# Altium PCB mcb.PcbDoc (part 1 of 2)
Units mil, origin at the board's own origin, x right, y up, seen from the top; angles counter-clockwise.
Board outline 4133.86 x 3543.31 mil, 2 copper layers (Top Layer, Bottom Layer); 79 components, 88 nets, 392 pads, 91 vias.
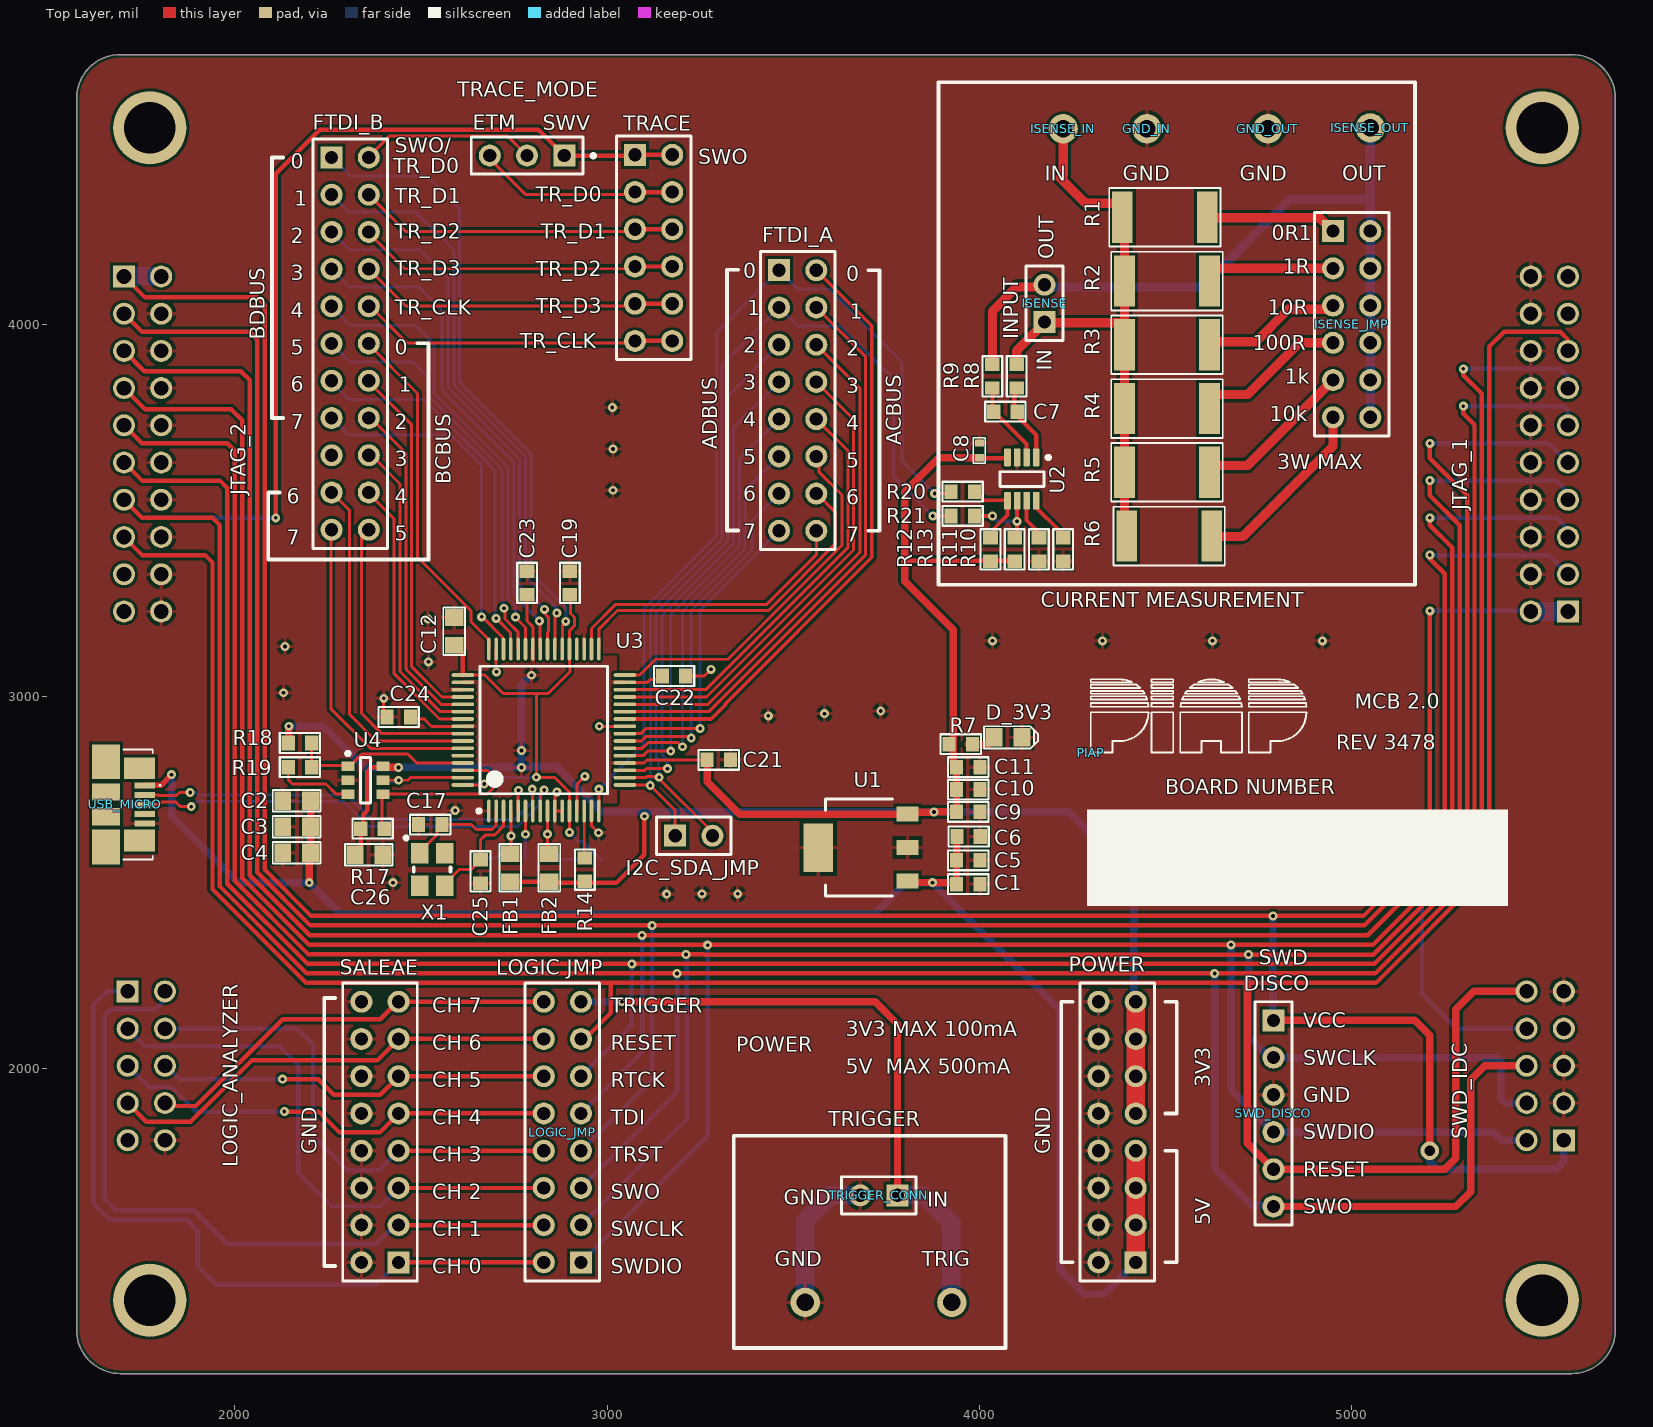
[diagram p0: Top Layer view]
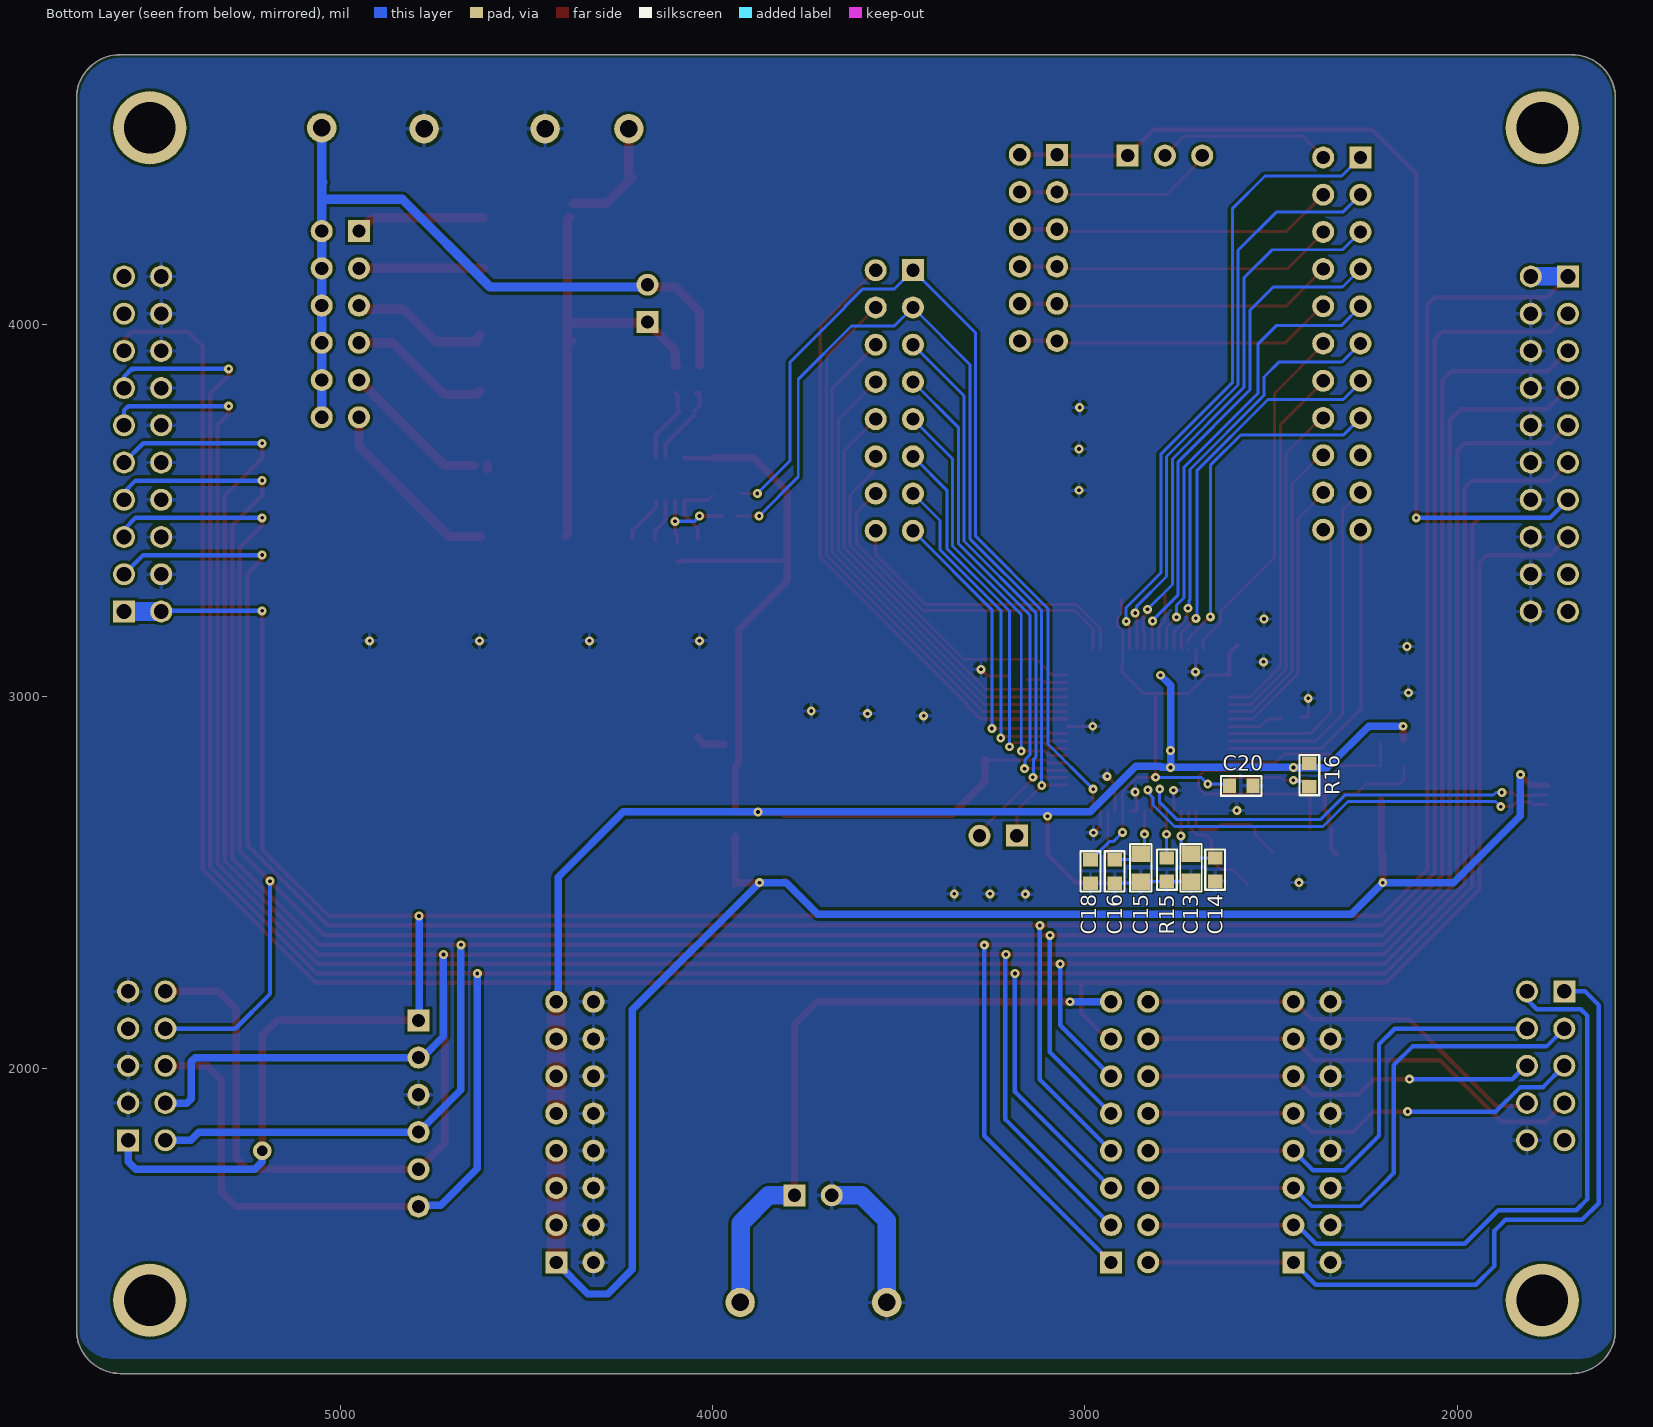
[diagram p1: Bottom Layer view, seen from below]
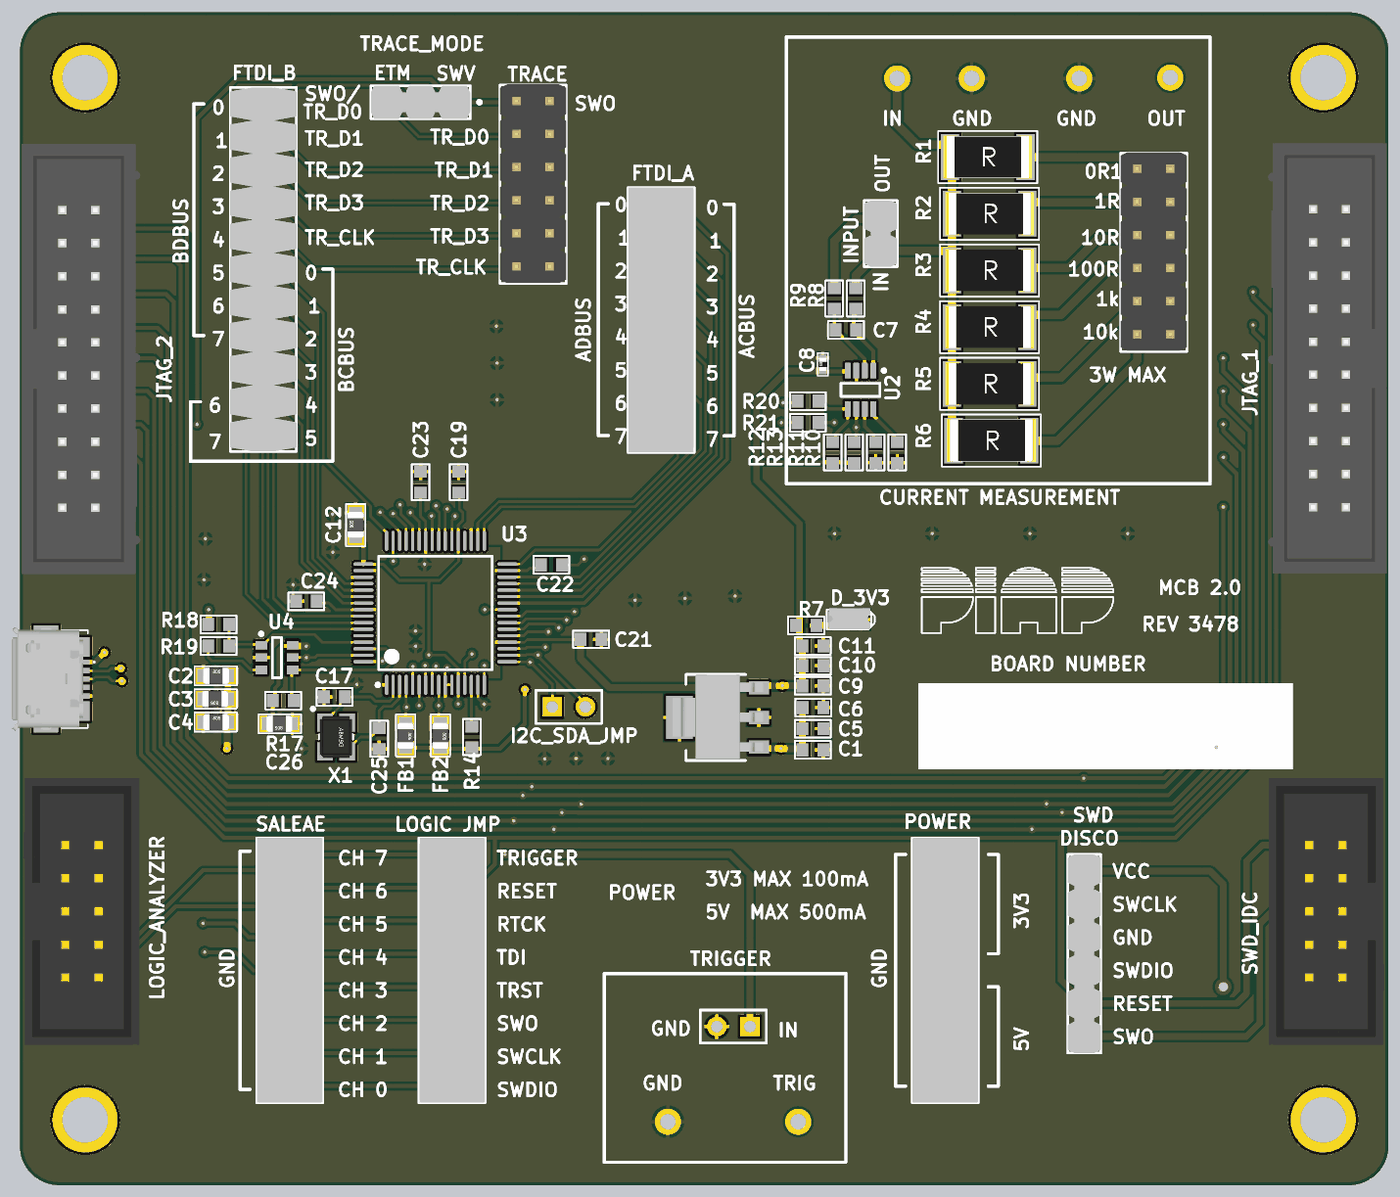
[diagram p2: 3D render of the assembled board from above, using the file's embedded part models]

## Layer stack, top to bottom
Top Solder: solder mask 0.4, Solder Resist, Dk 3.5
Top Layer: signal copper 1.4
Dielectric 1: dielectric 12.6, FR-4, Dk 4.8
Bottom Layer: signal copper 1.4
Bottom Solder: solder mask 0.4, Solder Resist, Dk 3.5

## Board outline
1574.8,4606.3 cw(c1692.91,4606.3) 1692.91,4724.41 5590.55,4724.41 cw(c5590.55,4606.3) 5708.66,4606.3 5708.66,1299.21 cw(c5590.56,1299.21) 5590.55,1181.1 1692.91,1181.1 cw(c1692.8,1299.09) 1574.8,1299.21

## Design rules (kind name [scope] priority, off if disabled: settings)
Clearance [All] p1: gap=7.5 ignorepadtopadclearanceinfootprint=FALSE
DiffPairsRouting "Schematic Differential Pairs Routing_1" [InNet('USB_N')] p1: maxlimit=10 minlimit=10 mostfreqgap=10 toplayer_minwidth=15 toplayer_maxwidth=15 toplayer_prefwidth=15 bottomlayer_minwidth=15 bottomlayer_maxwidth=15 bottomlayer_prefwidth=15 maxuncoupledlength=500
DiffPairsRouting "Schematic Differential Pairs Routing" [InNet('USB_P')] p2: maxlimit=10 minlimit=10 mostfreqgap=10 toplayer_minwidth=15 toplayer_maxwidth=15 toplayer_prefwidth=15 bottomlayer_minwidth=15 bottomlayer_maxwidth=15 bottomlayer_prefwidth=15 maxuncoupledlength=500
DiffPairsRouting [All] p3: maxlimit=10 minlimit=10 mostfreqgap=10 toplayer_minwidth=15 toplayer_maxwidth=15 toplayer_prefwidth=15 bottomlayer_minwidth=15 bottomlayer_maxwidth=15 bottomlayer_prefwidth=15 maxuncoupledlength=500
HoleSize [All] p1: absolutevalues=TRUE maxlimit=200 minlimit=10 maxpercent=80.000 minpercent=20.000
MatchedLengths [InNetClass('i2c')] p1: tolerance=100 checknetsindiffpair=FALSE checkdiffpairvsdiffpair=TRUE checkxsignals=TRUE checkothers=TRUE
MinimumAnnularRing [All] p1: minimumring=7
MinimumSolderMaskSliver [All] p1: minsoldermaskwidth=0
PolygonConnect [All] p1: connectstyle=Relief reliefconductorwidth=10 reliefentries=4 polygonreliefangle="90 Angle" airgapwidth=10
RoutingVias [All] p1: holewidth=12 width=22 viastyle="Through Hole" minholewidth=12 minwidth=22 maxholewidth=28 maxwidth=22
SilkToSilkClearance [All] p1: silktosilkclearance=0
SilkToSolderMaskClearance [IsPad] p1: minsilkscreentomaskgap=0 clearancetoexposedcopper=TRUE
SolderMaskExpansion [All] p1: expansion=8
Width Width_Power [InNetClass('Power')] p1: maxlimit=50 minlimit=15 preferedwidth=20
Width Width_measurements [InNetClass('Measurements')] p2: maxlimit=100 minlimit=20 preferedwidth=25 minimp=50.000000 maximp=50.000000 favimp=50.000000
25 further rules are at their usual default settings.

## Classes and differential pairs
component class usb_converter: C1 C5 C6 C9 C10 C11 C12 C13 C14 C15 C16 C17 C18 C19 C20 C21 C22 C23 C24 C25 C26 D_3V3 FB1 FB2 I2C_SDA_JMP R7 R14 R15 R16 R17 R18 R19 U1 U3 U4 X1
differential pair class DIFF90: USB
component class main: C2 C3 C4 C7 C8 FTDI_A FTDI_B GND GND_IN GND_OUT ISENSE ISENSE_IN ISENSE_JMP ISENSE_OUT JTAG_1 JTAG_2 LOGIC_ANALYZER LOGIC_JMP PIAP POWER R1 R2 R3 R4 R5 R6 R8 R9 R10 R11 R12 R13 R20 R21 SALEAE SWD_DISCO SWD_IDC TRACE TRACE_MODE TRIG TRIGGER_CONN U2 USB_MICRO
differential pair USB: +USB_P -USB_N

## Components (designator, comment, footprint, x,y, rotation, side; value= is the part's Value field where it differs from the comment)
C1 "10uF/16V" 0603 3970,2496 r180 top
C2 "10nF/16V X7R" 0805 2166,2720 r0 top
C3 "100nF/16V X7R" 0805 2166,2650 r180 top
C4 "4.7u/16V X7R" 0805 2166,2580 r0 top
C5 "10uF/16V" 0603 3970,2560 r180 top
C6 "100nF/16V" 0603 3971,2624 r180 top
C7 "NS" 0603 4070,3765 r0 top
C8 "100nF/16V" 0402 4000,3661 r90 top
C9 "100nF/16V" 0603 3970,2690 r180 top
C10 "10uF/16V" 0603 3970,2750 r180 top
C11 "10uF/16V" 0603 3970,2810 r180 top
C12 "3.3u/16V X7R" 0805 2589,3175 r90 top
C13 "4.7u/16V X7R" 0805 2715,2540 r270 bottom
C14 "100nF/16V" 0603 2650,2535 r270 bottom
C15 "4.7u/16V X7R" 0805 2850,2540 r270 bottom
C16 "100nF/16V" 0603 2920,2530 r270 bottom
C17 "27p" 0603 2525,2656 r180 top
C18 "100nF/16V" 0603 2985,2530 r270 bottom
C19 "100nF/16V" 0603 2900,3305 r90 top
C20 "100nF/16V" 0603 2580,2760 r180 bottom
C21 "100nF/16V" 0603 3300,2830 r0 top
C22 "100nF/16V" 0603 3180,3055 r0 top
C23 "100nF/16V" 0603 2785,3305 r90 top
C24 "100nF/16V" 0603 2440,2945 r180 top
C25 "27p" 0603 2660,2530 r270 top
C26 "100nF/16V X7R" 0805 2360,2575 r180 top
D_3V3 "LED Green" "LED SMD 0805" 4077,2890 r0 top
FB1 "MMZ2012R102A" 0805 2740,2540 r270 top
FB2 "MMZ2012R102A" 0805 2845,2540 r270 top
FTDI_A "Header 8X2" HDR2X8 3512,3795 r270 top
FTDI_B "Header 11X2" HDR2X11 2310,3948 r270 top
GND "TEST_POINT_THT" TEST_POINT_THT 3532.2,1372.44 r270 top
GND_IN "TEST_POINT_THT" TEST_POINT_THT 4450,4525 r90 top
GND_OUT "TEST_POINT_THT" TEST_POINT_THT 4775,4525 r90 top
I2C_SDA_JMP "Header 2" HDR1X2 3233,2626 r0 top
ISENSE "Header 2" HDR1X2 4175,4056 r90 top
ISENSE_IN "TEST_POINT_THT" TEST_POINT_THT 4225,4525 r90 top
ISENSE_JMP "" HDR2X6 5000,4000 r270 top
ISENSE_OUT "TEST_POINT_THT" TEST_POINT_THT 5050,4527.56 r90 top
JTAG_1 "DS1013-20SSIB1-B-0" HDR2X10 5531.18,3678.35 r90 top value="Header 10X2"
JTAG_2 "DS1013-20SSIB1-B-0" HDR2X10 1752.28,3678.35 r270 top value="Header 10X2"
LOGIC_ANALYZER "DS1013-10SSIB1" "HDR2X5 socet" 1762.28,2007.87 r270 top value="Header 5X2"
LOGIC_JMP "Header 8X2" HDR2X8 2880,1830 r90 top
PIAP "LOGO" PIAP_5mm 4299.16,2849.44 r0 top
POWER "Header 8X2" HDR2X8 4370,1830 r90 top
R1 "0.1R" 2512 4498.57,4287.3 r0 top
R2 "1R" 2512 4504,4116.04 r0 top
R3 "10R" 2512 4504,3944.78 r0 top
R4 "100R" 2512 4504,3773.52 r0 top
R5 "1k" 2512 4504,3602.26 r0 top value=1K
R6 "10K" 2512 4509.43,3431 r0 top
R7 "330R" 0603 3950,2872 r0 top
R8 "0R" 0603 4100,3860 r90 top
R9 "0R" 0603 4035,3860 r90 top
R10 "10k" 0603 4225,3395 r270 top
R11 "10k" 0603 4160,3395 r270 top
R12 "10k" 0603 4030,3395 r270 top
R13 "10k" 0603 4095,3395 r270 top
R14 "100k" 0603 2940,2535 r270 top
R15 "12k" 0603 2780,2535 r270 bottom
R16 "10k" 0603 2397,2789 r270 bottom
R17 "10k" 0603 2370,2645 r0 top
R18 "10k" 0603 2175,2875 r0 top
R19 "2k" 0603 2175,2810 r180 top
R20 "0R" 0603 3955,3550 r0 top
R21 "0R" 0603 3955,3485 r0 top
SALEAE "Header 8X2" HDR2X8 2390,1830 r90 top
SWD_DISCO "Header 6" HDR1X6 4790,1880 r270 top
SWD_IDC "DS1013-10SSIB1" "HDR2X5 socet" 5520,2007.87 r90 top value="Header 5X2"
TRACE "HDR-6X2" HDR2X6 3125,4205 r270 top
TRACE_MODE "Header 3" HDR1X3 2785,4453 r180 top
TRIG "TEST_POINT_THT" TEST_POINT_THT 3925.91,1372.44 r270 top
TRIGGER_CONN "Header 2" HDR1X2 3730,1660 r180 top
U1 "TC1262-3.3VDB" SOT223 3687,2594 r90 top
U2 "INA219BIDCNT" DCN0008A_M 4114,3584 r270 top
U3 "FT2232HL-Reel" LQFP-64_L 2830,2910 r90 top
U4 "93LC56BT-I/OT" SOT-23-OT6_L 2351,2775 r0 top
USB_MICRO "47346-0001" 47346-0001 1744.09,2807.09 r270 top locked
X1 "12 MHz" ABM8G 2530,2535 r270 top

## Footprints (in the part's own frame and the unit in brackets; to place one, negate y for a bottom-side part, rotate by r counter-clockwise, add the part's x,y. Pads: shape width x height; smd on the part's side, far side on the other; paste and mask are expansions set on the pad)
0402 [mm] "0402 SMD footprint"
  rect 0.5x0.6 smd: 1(-0.5,0) 2(0.5,0)
  silkscreen extent -0.87,-0.41 0.87,0.41, body extent -0.5,-0.3 0.5,0.3, height 0.2
0603 [mm] "Generic 0603 footprint"
  rect 0.9x1 smd: 1(-0.8,0) 2(0.8,0)
  silkscreen extent -1.38,-0.67 1.38,0.67, body extent -0.87,-0.48 0.88,0.47, height 1
0805 [mil]
  rect 45x50 smd paste-5: 1(-37.5,0) 2(37.5,0)
  silkscreen extent -64,-29 64,29, body extent -38,-25 41,25, height 31
2512 [mm] "3.7mm x 7.75mm"
  rect 1.4x3.5 smd: 1(-2.9,0) 2(2.9,0)
  silkscreen extent -3.8,-2 3.8,2, body extent -3.4,-1.65 3.4,1.65, height 0.64
47346-0001 [mm] "Molex USB micro B receptable"
  rect 0.406x1.38 smd: 1(1.163,0.36) 2(1.813,0.36) 3(2.462,0.36) 4(3.112,0.36) 5(3.763,0.36)
  rect 1.475x2.1 smd: SH1(0,0) SH2(4.925,0)
  rect 2.375x1.9 smd: SH3(-0.45,-2.3) SH6(5.375,-2.3)
  rect 1.175x1.9 smd: SH4(1.625,-2.3) SH5(3.3,-2.3)
  silkscreen extent -1.29,-1.1 6.21,1.45, body extent -1.54,-4.88 6.44,0.55, height 2.69
ABM8G [mm] "Small SMD Crystal"
  rect 1.4x1.2 smd: 1(-1.1,-0.85) 2(1.1,-0.85) 3(1.1,0.85) 4(-1.1,0.85)
  silkscreen extent -2.27,-1.89 0.15,1.25, body extent -1.6,-1.25 1.6,1.25, height 1.01
DCN0008A_M [mm] "SOT23, 8-Leads, Body 3x1.75mm, Pitch 0.65mm, IPC Low Density"
  rrect22% 1.2x0.45 smd: 1(-1.475,0.975) 2(-1.475,0.325) 3(-1.475,-0.325) 4(-1.475,-0.975) 5(1.475,-0.975) 6(1.475,-0.325) 7(1.475,0.325) 8(1.475,0.975)
  silkscreen extent -1.6,-1.5 0.5,1.92, body extent -0.88,-1.5 0.87,1.5, height 1.45
HDR1X2 [mm] "Connector; Header; 2 Position"
  rect 1.5x1.5 hole 0.9: 1(-1.27,0)
  round 1.5 hole 0.9: 2(1.27,0)
  silkscreen extent -2.54,-1.27 2.54,1.27
HDR1X3 [mm] "Connector; Header; 3 Position"
  rect 1.5x1.5 hole 0.9: 1(-2.54,0)
  round 1.5 hole 0.9: 2(0,0) 3(2.54,0)
  silkscreen extent -4.52,-1.27 3.81,1.27, body extent -3.81,-1.27 3.81,1.27, height 9.3
HDR1X6 [mm] "Connector; Header; 6 Position"
  rect 1.5x1.5 hole 0.9: 1(-6.35,0)
  round 1.5 hole 0.9: 2(-3.81,0) 3(-1.27,0) 4(1.27,0) 5(3.81,0) 6(6.35,0)
  silkscreen extent -7.62,-1.27 7.62,1.27, body extent -7.62,-1.27 7.62,1.27, height 9.32
"HDR2X5 socet" [mm] "Connector; Header; 5x2 Position"
  rect 1.5x1.5 hole 1: 1(-5.08,-1.27)
  round 1.5 hole 1: 2(-5.08,1.27) 3(-2.54,-1.27) 4(-2.54,1.27) 5(0,-1.27) 6(0,1.27) 7(2.54,-1.27) 8(2.54,1.27) 9(5.08,-1.27) 10(5.08,1.27)
  body extent -10.25,-4.5 10.25,4.4, height 9
HDR2X6 [mm] "Connector; Header; 6x2 Position"
  rect 1.5x1.5 hole 0.9: 1(-6.35,-1.27)
  round 1.5 hole 0.9: 2(-6.35,1.27) 3(-3.81,-1.27) 4(-3.81,1.27) 5(-1.27,-1.27) 6(-1.27,1.27) 7(1.27,-1.27) 8(1.27,1.27) 9(3.81,-1.27) 10(3.81,1.27) 11(6.35,-1.27) 12(6.35,1.27)
  silkscreen extent -7.62,-2.54 7.62,2.54, body extent -7.67,-2.54 7.57,2.54, height 8.59
HDR2X8 [mm] "Connector; Header; 8x2 Position"
  rect 1.5x1.5 hole 0.9: 1(-8.89,-1.27)
  round 1.5 hole 0.9: 2(-8.89,1.27) 3(-6.35,-1.27) 4(-6.35,1.27) 5(-3.81,-1.27) 6(-3.81,1.27) 7(-1.27,-1.27) 8(-1.27,1.27) 9(1.27,-1.27) 10(1.27,1.27) 11(3.81,-1.27) 12(3.81,1.27) 13(6.35,-1.27) 14(6.35,1.27) 15(8.89,-1.27) 16(8.89,1.27)
  silkscreen extent -10.16,-2.54 10.16,2.54, body extent -10.16,-2.5 10.16,2.5, height 9.5
HDR2X10 [mm] "Connector; Header; 10x2 Position"
  rect 1.5x1.5 hole 1: 1(-11.43,-1.27)
  round 1.5 hole 1: 2(-11.43,1.27) 3(-8.89,-1.27) 4(-8.89,1.27) 5(-6.35,-1.27) 6(-6.35,1.27) 7(-3.81,-1.27) 8(-3.81,1.27) 9(-1.27,-1.27) 10(-1.27,1.27) 11(1.27,-1.27) 12(1.27,1.27) 13(3.81,-1.27) 14(3.81,1.27) 15(6.35,-1.27) 16(6.35,1.27) 17(8.89,-1.27) 18(8.89,1.27) 19(11.43,-1.27) 20(11.43,1.27)
  body extent -16.48,-4.37 16.54,4.73, height 8.75
HDR2X11 [mm] "Connector; 2.54mm; Header; 11x2 Position"
  rect 1.5x1.5 hole 0.9: 1(-12.7,-1.27)
  round 1.5 hole 0.9: 2(-12.7,1.27) 3(-10.16,-1.27) 4(-10.16,1.27) 5(-7.62,-1.27) 6(-7.62,1.27) 7(-5.08,-1.27) 8(-5.08,1.27) 9(-2.54,-1.27) 10(-2.54,1.27) 11(0,-1.27) 12(0,1.27) 13(2.54,-1.27) 14(2.54,1.27) 15(5.08,-1.27) 16(5.08,1.27) 17(7.62,-1.27) 18(7.62,1.27) 19(10.16,-1.27) 20(10.16,1.27) 21(12.7,-1.27) 22(12.7,1.27)
  silkscreen extent -13.97,-2.54 13.97,2.54, body extent -13.97,-2.54 13.97,2.54, height 9.3
"LED SMD 0805" [mil]
  rect 45x50 smd: 1(-37.5,0) 2(37.5,0)
  silkscreen extent -65,-30 80,30, body extent -57,-29 67,34, height 39
LQFP-64_L [mm] "Thin QFP, 64-Leads, Body 10x10mm, Pitch 0.5mm, IPC High Density"
  oval 1.55x0.25 smd: 1(-5.525,3.75) 2(-5.525,3.25) 3(-5.525,2.75) 4(-5.525,2.25) 5(-5.525,1.75) 6(-5.525,1.25) 7(-5.525,0.75) 8(-5.525,0.25) 9(-5.525,-0.25) 10(-5.525,-0.75) 11(-5.525,-1.25) 12(-5.525,-1.75) 13(-5.525,-2.25) 14(-5.525,-2.75) 15(-5.525,-3.25) 16(-5.525,-3.75) 33(5.525,-3.75) 34(5.525,-3.25) 35(5.525,-2.75) 36(5.525,-2.25) 37(5.525,-1.75) 38(5.525,-1.25) 39(5.525,-0.75) 40(5.525,-0.25) 41(5.525,0.25) 42(5.525,0.75) 43(5.525,1.25) 44(5.525,1.75) 45(5.525,2.25) 46(5.525,2.75) 47(5.525,3.25) 48(5.525,3.75)
  oval 0.25x1.55 smd: 17(-3.75,-5.525) 18(-3.25,-5.525) 19(-2.75,-5.525) 20(-2.25,-5.525) 21(-1.75,-5.525) 22(-1.25,-5.525) 23(-0.75,-5.525) 24(-0.25,-5.525) 25(0.25,-5.525) 26(0.75,-5.525) 27(1.25,-5.525) 28(1.75,-5.525) 29(2.25,-5.525) 30(2.75,-5.525) 31(3.25,-5.525) 32(3.75,-5.525) 49(3.75,5.525) 50(3.25,5.525) 51(2.75,5.525) 52(2.25,5.525) 53(1.75,5.525) 54(1.25,5.525) 55(0.75,5.525) 56(0.25,5.525) 57(-0.25,5.525) 58(-0.75,5.525) 59(-1.25,5.525) 60(-1.75,5.525) 61(-2.25,5.525) 62(-2.75,5.525) 63(-3.25,5.525) 64(-3.75,5.525)
  silkscreen extent -5.65,-4.35 4.35,4.55, body extent -5,-5 5,5, height 1.6
PIAP_5mm [mil]
  silkscreen extent 0,0 579,197
SOT223 [mil]
  rect 40x60 smd: 1(-90,-120) 2(0,-120) 3(90,-120)
  rect 130x80 smd: 2(0,120)
  silkscreen extent -130,-80 130,100, body extent -127,-132 129,140, height 66
SOT-23-OT6_L [mm] "SOT23, 6-Leads, Body 2.9x1.7mm, Pitch 0.95mm, Lead Span 2.8mm, IPC High Density"
  rect 0.9x0.65 smd: 1(-1.2,0.95) 2(-1.2,0) 3(-1.2,-0.95) 4(1.2,-0.95) 5(1.2,0) 6(1.2,0.95)
  silkscreen extent -1.32,-1.55 0.35,1.95, body extent -0.9,-1.55 0.9,1.55, height 1.45
TEST_POINT_THT [mm]
  round 2 hole 1.2 paste+0 mask+0: 1(0,0)

## Part data
C1 C5 C10 C11: "10uF,16V,0603,X5R, 10%", DIelectric=X5R, Tolerance=10%, Supplier 1=Farnell
C2: library part n100, "Chip Capacitor 10nF/16V X7R", Dostawca=Farnell, email=AGrabowska@farnell.com, Opis="Chip Capacitor", Tel/Fax="+48 12 4424724"
C3 C26: library part n100, "Chip Capacitor 100nF/16V X7R", Dostawca=Farnell, email=AGrabowska@farnell.com, Opis="Chip Capacitor", Tel/Fax="+48 12 4424724"
C4 C13 C15: library part n100, "Chip Capacitor 4.7u/16V X7R", Dostawca=Farnell, email=AGrabowska@farnell.com, Opis="Chip Capacitor", Tel/Fax="+48 12 4424724"
C6 C9: "100nF,16V,0603,,X7R", DIelectric=X7R, Tolerance=10%, Supplier 1=Farnell
C7: library part n100, Dostawca=Farnell, email=AGrabowska@farnell.com, Opis="Chip Capacitor", Tel/Fax="+48 12 4424724"
C8 C14 C16 C17 C18 C19 C20 C21 C22 C23 C24 C25: library part n100, "NS", Dostawca=Farnell, email=AGrabowska@farnell.com, Opis="Chip Capacitor", Tel/Fax="+48 12 4424724"
C12: library part n100, "Chip Capacitor 3.3u/16V X7R", Dostawca=Farnell, email=AGrabowska@farnell.com, Opis="Chip Capacitor", Tel/Fax="+48 12 4424724"
D_3V3: "LED Green 0805", Manufacturer Part Number=KP-2012SGD, HelpURL="O:\Protel\Library\Data Sheet\Optoelectronics\KP2012xxx.pdf", Supplier 1=TME, Supplier Part Number 1=KP-2012SGD
FB1 FB2: "Chip ferrite bead 500mA", Supplier Part Number 1=1669719, HelpURL=http://www.farnell.com/datasheets/84901.pdf, Manufacturer Part Number=MMZ2012R102A, Supplier 1=Farnell
FTDI_A LOGIC_JMP POWER SALEAE: "Header, 16-Pin, Dual row, 2.54mm", Cena jednostkowa=7,59, Dostawca=TME, Nr katalogowy=280385-2
FTDI_B: "Header, 22-Pin, Dual row, 2.54mm"
I2C_SDA_JMP ISENSE TRIGGER_CONN: "Header, 2-Pin,  2.54mm", Cena jednostkowa=1,89, Dostawca=TME, Nr katalogowy=280370-2
ISENSE_JMP: library part "Header 6X2", "Header, 6-Pin, Dual row", Supplier Part Number 1=1022237, LatestRevisionDate=17-Jul-2002, LatestRevisionNote="Re-released for DXP Platform.", Publisher="Altium Limited", Supplier 1=Farnell, Supplier 2=Mouser, Supplier Part Number 2=855-M20-9980645
JTAG_1 JTAG_2: library part "Header 10X2", "Header, 20-Pin, Dual row, 2.54mm", Manufacturer Part Number=DS1013-20SSIB1-B-0, Pricing 1="2=0.3333, 10=0.2271, 100=0.1514, 1000=0.1261, 3000=0.1009 (USD)", Stock 1=60169, Supplier 1=TME
LOGIC_ANALYZER SWD_IDC: library part "Header 5X2", "Header, 10-Pin, Dual row, 2.54mm", Dostawca=TME, Manufacturer Part Number=DS1013-10SSIB1, Pricing 1="10=0.097, 50=0.0772, 200=0.0661, 1000=0.0551, 5000=0.0441 (USD)", Stock 1=66977, Supplier 1=TME
PIAP: "Logo PIAP"
R1: library part 1R, "Resistor 0.1R 3W 1%", Manufacturer="Royal Electronic Factory", Manufacturer Part Number=SP123WF100KT1E, Supplier Part Number 1=A103632CT-ND, ComponentLink1Description=http://datasheet.octopart.com/SP123WF100KT1E-Royal-Ohm-datasheet-86661178.pdf, ComponentLink1URL=http://datasheet.octopart.com/SP123WF100KT1E-Royal-Ohm-datasheet-86661178.pdf, Dok砤dno滄=5%, Dostawca=Farnell, Pricing 1="1=0.772, 10=0.363, 100=0.227, 1000=0.173, 4000=0.1545 (USD)", Stock 1=0, Supplier 1=Digi-Key, Supplier 2=Farnell, Supplier Part Number 2=1086356
R2: "Resistor 1R 3W 1%", Manufacturer="Royal Electronic Factory", Manufacturer Part Number=SP123WF100KT1E, Supplier Part Number 1=SP12-1R-1%, ComponentLink1Description=http://datasheet.octopart.com/SP123WF100KT1E-Royal-Ohm-datasheet-86661178.pdf, ComponentLink1URL=http://datasheet.octopart.com/SP123WF100KT1E-Royal-Ohm-datasheet-86661178.pdf, Dok砤dno滄=1%, Dostawca=Farnell, Pricing 1="1=0.772, 10=0.363, 100=0.227, 1000=0.173, 4000=0.1545 (USD)", Stock 1=0, Supplier 1=TME
R3: library part 1R, "Resistor 10R 3W 1%", Manufacturer="Royal Electronic Factory", Manufacturer Part Number=SP123WF100JT1E, Supplier Part Number 1=SP12-10R-1%, ComponentLink1Description=http://datasheet.octopart.com/SP123WF100JT1E-Royal-Ohm-datasheet-86661178.pdf, ComponentLink1URL=http://datasheet.octopart.com/SP123WF100JT1E-Royal-Ohm-datasheet-86661178.pdf, Dok砤dno滄=1%, Dostawca=Farnell, Pricing 1="1=0.772, 10=0.363, 100=0.227, 1000=0.173, 4000=0.1545 (USD)", Stock 1=410, Supplier 1=TME
R4: library part 1R, "Resistor 100R 2W 1%", Manufacturer="Royal Electronic Factory", Manufacturer Part Number=SP123WJ0101T1E, Supplier Part Number 1=SP12-100R-1%, ComponentLink1Description=http://datasheet.octopart.com/SP123WJ0101T1E-Royal-Ohm-datasheet-86661178.pdf, ComponentLink1URL=http://datasheet.octopart.com/SP123WJ0101T1E-Royal-Ohm-datasheet-86661178.pdf, Dok砤dno滄=1%, Dostawca=Farnell, Pricing 1="5=0.315, 25=0.214, 100=0.134, 1000=0.102, 4000=0.0909 (USD)", Stock 1=1973, Supplier 1=TME
R5: library part 1R, "Resistor 1k 2W 1%", Manufacturer="Royal Electronic Factory", Manufacturer Part Number=SP123WF1001T1E, Supplier Part Number 1=SP12-1K-1%, ComponentLink1Description=http://datasheet.octopart.com/SP123WF1001T1E-Royal-Ohm-datasheet-86661178.pdf, ComponentLink1URL=http://datasheet.octopart.com/SP123WF1001T1E-Royal-Ohm-datasheet-86661178.pdf, Dok砤dno滄=1%, Dostawca=Farnell, Pricing 1="1=0.772, 10=0.363, 100=0.227, 1000=0.173, 4000=0.1545 (USD)", Stock 1=718, Supplier 1=TME
R6: library part 1R, "Resistor 10K 3W 1%", Manufacturer="Royal Electronic Factory", Manufacturer Part Number=SP123WF100KT1E, Supplier Part Number 1=A121120CT-ND, ComponentLink1Description=http://datasheet.octopart.com/SP123WF100KT1E-Royal-Ohm-datasheet-86661178.pdf, ComponentLink1URL=http://datasheet.octopart.com/SP123WF100KT1E-Royal-Ohm-datasheet-86661178.pdf, Dok砤dno滄=1%, Dostawca=Farnell, Pricing 1="1=0.772, 10=0.363, 100=0.227, 1000=0.173, 4000=0.1545 (USD)", Stock 1=0, Supplier 1=Digi-Key, Supplier 2=Farnell, Supplier 3=Mouser, Supplier Part Number 2=2476512, Supplier Part Number 3=279-352210KFT
R7: "Chip Resistor 0402", Tolerance=1%
R8 R10 R11 R12 R13 R16 R17 R18 R20 R21: library part k100, "Chip Resistor 0Ohm 0.25W", Dok砤dno滄=1%, Dostawca=Farnell, HelpURL=http://www.vishay.com/docs/20035/dcrcwe3.pdf, ID=CRCW0805100KFKEA, Nr katalogowy=1469860
R9: library part k100, "Chip Resistor 0 Ohm 0.25W", Dok砤dno滄=1%, Dostawca=Farnell, HelpURL=http://www.vishay.com/docs/20035/dcrcwe3.pdf, ID=CRCW0805100KFKEA, Nr katalogowy=1469860
R14: library part k100, "Chip Resistor 100k O.25W", Dok砤dno滄=1%, Dostawca=Farnell, HelpURL=http://www.vishay.com/docs/20035/dcrcwe3.pdf, ID=CRCW0805100KFKEA, Nr katalogowy=1469860
R15 R19: library part k100, "Chip Resistor 0.25W", Dok砤dno滄=1%, Dostawca=Farnell
SWD_DISCO: "Header, 6-Pin, 2.54mm", Cena jednostkowa=0,33, Dostawca=TME, Nr katalogowy=ZL262-6SG
TRACE: library part "Header 6x2", "Header, 12-Pin, Dual row, SMD, 2.54mm"
TRACE_MODE: "Header, 3-Pin,  2.54mm"
U1: "3-Terminal 3.3V 500mA Regulator", Manufacturer=MICROCHIP, Supplier Part Number 1=1852183, HelpURL="O:\Protel\Library\Data Sheet\National\LM117,317.pdf", Manufacturer Part Number=TC1262-3.3VDB, Supplier 1=Farnell
U2: library part CMP-0704-00042-2, "Zero-Drift, Bi-Directional Current / Power Monitor, 3 to 5.5 V, -40 to 125 degC, 8-pin SOP (DCN8), Green (RoHS & no Sb/Br)", Manufacturer="Texas Instruments", Quiescent Current (+/-)(Typ)(mA)=0.7, Rating=Catalog, Supplier Part Number 1=595-INA219BIDCNT, CMRR(Min)(dB)=100, Code_JEDEC=MO-178, Common Mode Range(Max)(V)=26, Common Mode Range(Min)(V)=0, ComponentLink1Description="Manufacturer URL", ComponentLink1URL=http://www.ti.com/, ComponentLink2Description=Datasheet, ComponentLink2URL=http://www.ti.com/general/docs/lit/getliterature.tsp?genericPartNumber=INA219&fileType=pdf, ComponentLink3Description="Package Specification", ComponentLink3URL=http://www.ti.com/lit/ml/mpds099c/mpds099c.pdf, DatasheetVersion=SBOS448F, Eco-Plan="Green (RoHS & no Sb/Br)", Gain(V/V)="1, 0.5, 0.25, 0.125", Input Offset (+/-)(Max)(uV)=50, Mounting Technology="Surface Mount", PackageDescription="8-Pin Plastic Small Outline, Body 1.6 x 2.9 mm, Pitch 0.65 mm", PackageReference=DCN0008A, PackageVersion="4202106/D, 11/2009", PartNumber=INA219BIDCNT, Small-Signal Bandwidth(Typ)(MHz)=0.011, SubFamily="Current Shunt Monitor", Supplier 1=Mouser, Vs(Max)(V)=5.5, Vs(Min)(V)=3
U3: library part CMP-0078-00023-2, "Dual High Speed USB To Multipurpose UART/FIFO IC, LQFP-64, Tape and Reel", ComponentLink1Description="Manufacturer URL", ComponentLink1URL=http://www.ftdichip.com/, ComponentLink2Description=Datasheet, ComponentLink2URL=http://www.ftdichip.com/Support/Documents/DataSheets/ICs/DS_FT2232H.pdf, DatasheetVersion="ver 2.10, Nov-2010", PackageDescription="64-Pin Thin Quad Flat Pack, 10 x 10 x 1.4 mm Body, 0.5 mm Pitch", PackageReference=LQFP-64, PackageVersion=2010, RevisionNote="URLs added."
U4: library part CMP-0162-00356-1, "2K, 128x16-bit, 2.5V Microwire Serial EEPROM, 6-Pin SOT-23, Industrial Temperature, Tape and Reel", Code_IPC=SOT26A-6, DatasheetVersion="revF, May-2008", PackageDescription="6-Lead Plastic Small Outline Transistor (OT) [SOT-23]", PackageReference=SOT-23-OT6, PackageVersion="revBB, Aug-2009"
X1: library part ABM8G-12.000MHZ-4Y-T3, "ABRACON  ABM8G-12.000MHZ  CRYSTAL, 12MHZ, 10PF, 3.2 X 2.5MM", Manufacturer=ABRACON, Cena jednostkowa=3, Dostawca=Farnell, HelpURL=http://www.farnell.com/datasheets/1883677.pdf, ID=ABM8G-12.000MHZ, Nr katalogowy=2467841, url=http://pl.farnell.com/abracon/abm8g-16-000mhz-18-d2y-t/crystal-16mhz-18pf-3-2-x-2-5mm/dp/2467841

## Free pads (board coordinates)
  round 196.85 hole 137.8: 5(1771.65,1377.95) 5(1771.65,4527.56) 5(5511.81,1377.95) 5(5511.81,4527.56)

## Via types
v1: diameter 24, hole 10, Top Layer to Bottom Layer, tented both sides, 83 vias
v2: diameter 24, hole 10, Top Layer to Bottom Layer, 7 vias
v3: diameter 50, hole 28, Top Layer to Bottom Layer, tented both sides, 1 vias

## Nets (pads, with @x,y where several pads share a name; then routed paths per layer and width w, separated by ;. In a path a pad name is that pad's centre, name@x,y a point inside that pad or via, vN(x,y) a via of type N, cw(c..) or ccw(c..) an arc to the next point about the centre after c; other vN are vias at no path point)
1V8: C12.1 C18.1 C19.1 C20.1 U3.12 U3.37 U3.49 U3.64 | length 1452.3
  Top Layer w8: U3.64 2612.83,2762.71 2667.71,2762.71 v1(2670,2765) ; U3.49 2612.83,3057.29 2671.71,3057.29 2721,3008 2808,3008 ; v1(2898.9,2635) U3.12 2898.9,2742.87 2858.77,2783 v1(2810,2783) 2810,3006 2808,3008 ; C19.1@2900,3260.32 2901.97,3260.32 2901.97,3223.03 2912.5,3212.5 2912.5,3189.86 2898.9,3176.25 U3.37 2898.9,3084.27 2900,3083.16 2900,3066 2842,3008 2808,3008
  Top Layer w12: C12.1 2591.5,3137.5 2612.48,3116.52 U3.49
  Bottom Layer w8: C20.1 2616.5,2765 v1(2670,2765) 2688,2783 v1(2810,2783) ; v1(2898.9,2635) 2923.9,2610 2934.53,2610 2983.03,2561.5 C18.1
3V3: C8.1 C9.2 C10.2 C11.2 C21.1 C22.1 C23.1 C24.1 C26.2 FB1.2 FB2.2 POWER.9 POWER.11 POWER.13 POWER.15 R7.1 R12.2 R13.2 R14.2 R16.1 R17.1 R18.1 U1.3 U2.4 U3.20 U3.31 U3.42 U3.50 U3.56 U4.6 | length 7140.8
  Top Layer w8: C24.1 2476.5,2940 2508,2940 2528.51,2919.49 2612.13,2919.49 U3.56 ; C23.1 2785,3202.77 2800.47,3187.29 U3.42 ; U3.20 3099.1,2821.42 3107.18,2829.5 3268,2829.5 C21.1 ; U3.31 3107.95,3037.95 3115,3045 C22.1@3155.31,3045 ; C21.1@3278.47,2826.5 C21.1@3280.47,2828.5
  Top Layer w12: C26.2 2338.5,2591 R17.1 ; R17.1@2345,2655 2345,2682.5 2356.32,2693.81 2356.32,2798.32 2368,2810 2395.84,2810 U4.6 ; FB1.2 2828.5,2502.5 2828.5,2486 FB2.2 2847.5,2502.5 2850,2500 2940,2500 3025,2500 3100,2575 v2@3100,2678 ; 3800,3365 4074.69,3365 4073.19,3363.5 R13.2 ; C8.1@4000,3639.68 4073.23,3639.68 U2.4
  Top Layer w20: R18.1@2145,2885 v1(2145,2920) ; U4.6 2400.72,2809.92 2439.08,2809.92 v1(2439.84,2809.16) ; C21.1 3268.5,2771.5 3356,2684 U1.3 3812.62,2689.62 3877.62,2689.62 v2(3878,2690) C9.2 C10.2 C11.2 3938.5,2811.97 3930.32,2820.16 3930.32,3179.17 3800,3309.48 3800,3365 3800,3550 3891,3641 C8.1@4000,3641
  Top Layer w50: POWER.9 POWER.11 POWER.13 POWER.15
  Bottom Layer w20: v1(2145,2920) 2238,2920 2348.84,2809.16 v1(2439.84,2809.16) ; v1@2439.84,2810 v1@2769.84,2810 ; v1(2769.84,2809.16) v1@2769.84,2810 ; v1(2797,3057) 2769.84,3029.84 v1(2769.84,2855) v1@2769.84,2810 ; v2(3878,2690) 2986,2690 2863.5,2812.5 2797.78,2812.5 2795.2,2809.92 2769.92,2809.92 v1@2769.84,2810 ; v2@3880,2690 4240,2690 4415,2515 POWER.15@4415,2180
  other v2: 3100.38,2678.38
5V: C1.2 C2.2 C3.1 C4.2 C5.2 C6.2 POWER.1 POWER.3 POWER.5 POWER.7 U1.1 USB_MICRO.1 | length 4614.1
  Top Layer w15: USB_MICRO.1 1801.32,2761.32 v2(1830,2790)
  Top Layer w20: v2(2200,2500) 2200.38,2500.38 2200.38,2576.88 C4.2 C3.1 C2.2 ; U1.1 3810.62,2500.38 3873.62,2500.38 v2(3874,2500) 3874.38,2499.62 3934.89,2499.62 C1.2 C5.2 3939,2560.5 3939,2623.5 C6.2
  Top Layer w50: POWER.1 POWER.3 POWER.5 POWER.7
  Bottom Layer w20: v2(1830,2790) 1830,2680 2010,2500 v2(2200,2500) 2284.5,2415.5 3717.5,2415.5 3802,2500 v2(3874,2500) 4216,2158 4216,1461 4282,1395 4335,1395 POWER.1
ACBUS0: FTDI_A.2 U3.26 | length 1677.9
  Top Layer w10: U3.26 3279.53,2939.53 3318,2978 3318,2980.75 3711,3373.75 3711,3996 FTDI_A.2
ACBUS1: FTDI_A.4 U3.27 | length 1540.8
  Top Layer w8: U3.27 3273.13,2959.21 3694.5,3380.58 3694.5,3912.5 FTDI_A.4
ACBUS2: FTDI_A.6 U3.28 | length 1407
  Top Layer w8: U3.28 3270.9,2978.9 3679,3387 3679,3828 FTDI_A.6
ACBUS3: FTDI_A.8 U3.29 | length 1271.1
  Top Layer w8: U3.29 3267.34,2998.58 3662,3393.24 3662,3745 FTDI_A.8
ACBUS4: FTDI_A.10 U3.30 | length 1137.3
  Top Layer w8: U3.30 3265.11,3018.27 3646.5,3399.66 3646.5,3660.5 FTDI_A.10
ACBUS5: FTDI_A.12 U3.32 | length 995.3
  Top Layer w8: U3.32 3087.64,3057.64 3130,3100 3324.92,3100 3631,3406.08 3631,3541.09 3568.62,3603.47 3568.62,3638.38 FTDI_A.12
ACBUS6: FTDI_A.14 U3.33 | length 940.2
  Top Layer w8: U3.33 2977.64,3180.64 3028,3231 3434,3231 3613,3410 3613,3495 3563,3545 FTDI_A.14
ACBUS7: FTDI_A.16 U3.34 | length 805.5
  Top Layer w8: U3.34 2957.95,3182.87 3021.58,3246.5 3427.58,3246.5 3562,3380.92 FTDI_A.16
ADBUS0: FTDI_A.1 R20.1 U3.16 | length 2521
  Top Layer w8: U3.16 2977.64,2750.64 v1@2978,2751 ; v1(3880,3545) R20.1@3925,3545
  Bottom Layer w8: v1(2977.84,2751.16) 3099,2872.32 3099,3235.68 3293.5,3430.18 3293.5,3976.5 FTDI_A.1 3513,4094 3598,4094 3645,4047 3645,4045 3792,3898 3792,3633 v1(3880,3545)
ADBUS1: FTDI_A.3 I2C_SDA_JMP.1 R21.1 U3.17 | length 2517.9
  Top Layer w8: U3.17 3047.87,2762.01 3114.99,2762.01 v1(3116,2761) 3183,2694 I2C_SDA_JMP.1 ; v1(3875,3485) 3891,3485 R21.1@3935.32,3485
  Bottom Layer w8: v1(3116,2761) 3116,3230.76 3309,3423.76 3309,3892 FTDI_A.3 3512,3995 3627,3995 3770,3852 3770,3590 v1(3875,3485)
ADBUS2: FTDI_A.5 I2C_SDA_JMP.2 U3.18 | length 1607.7
  Top Layer w8: U3.18 3103.81,2782.05 3106.27,2784.5 3125.73,2784.5 3127.62,2782.62 v1@3133,2788 ; v1(3140,2783) 3140,2778.67 3283,2635.67 I2C_SDA_JMP.2
  Bottom Layer w8: v1(3140,2783) 3138.5,2784.5 3138.5,2830.35 3132,2836.85 3132,3224.84 3324.5,3417.34 3324.5,3807.5 FTDI_A.5
ADBUS3: FTDI_A.7 U3.19 | length 1291.9
  Top Layer w8: U3.19 3101.33,2801.73 3106.1,2806.5 3161.5,2806.5 v1(3162,2806)
  Bottom Layer w8: v1(3162,2806) 3160.77,2807.23 3160.77,2830 3147.5,2843.27 3147.5,3218.42 3340,3410.92 3340,3723 FTDI_A.7
ADBUS4: FTDI_A.9 U3.21 | length 1140.9
  Top Layer w8: U3.21 3096.86,2841.1 3108.76,2853 v1(3171,2853)
  Bottom Layer w8: v1(3171,2853) 3171,3220 3355.5,3404.5 3355.5,3638.5 FTDI_A.9
ADBUS5: FTDI_A.11 U3.22 | length 1053.8
  Top Layer w8: U3.22 3094.63,2860.79 3110.34,2876.5 3190.5,2876.5 3202.05,2864.95 v1(3202.5,2864.95)
  Bottom Layer w8: v1(3202.5,2864.95) 3202.5,3229.34 3371,3397.84 3371,3554 FTDI_A.11
ADBUS6: FTDI_A.13 U3.23 | length 939
  Top Layer w8: U3.23 3092.39,2880.47 3103.92,2892 3218.12,2892 3221.67,2888.45 v1(3226,2888.45)
  Bottom Layer w8: v1(3226,2888.45) 3226,3230.92 3389.5,3394.42 3389.5,3472.5 FTDI_A.13
ADBUS7: FTDI_A.15 U3.24 | length 827
  Top Layer w8: U3.24 3090.16,2900.16 3104,2914 v1(3250,2914)
  Bottom Layer w8: v1(3250,2914) 3250,3233 FTDI_A.15
BCBUS0: FTDI_B.12 U3.48 | length 955.2
  Top Layer w8: FTDI_B.12@2357,3948 2491,3814 2491,3374.26 2634,3231.26 2634,3201.47 2682.36,3153.11 U3.48
BCBUS1: FTDI_B.14 U3.52 | length 978.2
  Top Layer w8: FTDI_B.14@2364,3841 2475,3730 2475,3079.92 2556.34,2998.58 U3.52
BCBUS2: FTDI_B.16 U3.53 | length 909.3
  Top Layer w8: FTDI_B.16@2362.5,3750.5 2459.5,3653.5 2459.5,3073.5 2554.1,2978.9 U3.53
BCBUS3: FTDI_B.18 U3.54 | length 840.8
  Top Layer w8: FTDI_B.18@2356.5,3658.5 2444,3571 2444,3067.08 2551.87,2959.21 U3.54
BCBUS4: FTDI_B.20 U3.55 | length 741.2
  Top Layer w8: FTDI_B.20@2364,3541 2427,3478 2427,3062.16 2549.63,2939.53 U3.55
BCBUS5: FTDI_B.22 U3.57 | length 798.1
  Top Layer w8: FTDI_B.22@2359,3450 2340,3431 2340,2955 2394.84,2900.16 U3.57
BCBUS6: FTDI_B.19 U3.58 | length 950
  Top Layer w8: FTDI_B.19 2308,3500 2308,2952 2379.53,2880.47 U3.58
BCBUS7: FTDI_B.21 U3.59 | length 876.5
  Top Layer w8: FTDI_B.21@2258,3445 2258,2967 2364.21,2860.79 U3.59
BDBUS0: FTDI_B.1 U3.38 | length 1705.7
  Top Layer w8: U3.38 2880.5,3128.81 2880.5,3190.71 2889,3199.21 v1(2889,3202)
  Bottom Layer w8: FTDI_B.1 2310,4398 2516,4398 2604,4310 2604,3842.84 2796,3650.84 2796,3332 2889,3239 v1(2889,3202)
BDBUS1: FTDI_B.3 U3.39 | length 1578.2
  Top Layer w8: U3.39 2859.53,3214.2 2865,3219.67 v1(2865,3224)
  Bottom Layer w8: FTDI_B.3 2306,4302 2485,4302 2588.5,4198.5 2588.5,3836.42 2780.5,3644.42 2780.5,3322.5 2861.94,3241.06 2861.94,3227.06 v1(2865,3224)
BDBUS2: FTDI_B.5 U3.40 | length 1473.3
  Top Layer w8: v1(2832,3234) 2832,3222.82 2842.16,3212.66 2842.16,3174.97 2839.84,3172.66 U3.40
  Bottom Layer w8: FTDI_B.5 2308,4200 2497,4200 2573,4124 2573,3830 2765,3638 2765,3301 v1(2832,3234)
BDBUS3: FTDI_B.7 U3.41 | length 1363
  Top Layer w8: v1@2819,3205 2820.16,3203.84 U3.41
  Bottom Layer w8: FTDI_B.7 2308,4100 2494,4100 2557,4037 2557,3823 2749.5,3630.5 2749.5,3273.5 2818,3205 v1(2818,3203)
BDBUS4: FTDI_B.9 U3.43 | length 1244.4
  Top Layer w8: v1@2760,3213 v1(2754,3213) 2754,3211.85 2780.79,3185.06 U3.43
  Bottom Layer w8: FTDI_B.9@2259.5,4047.5 2310,3997 2485,3997 2534.5,3947.5 2534.5,3815.26 2734,3615.76 2734,3265 2754,3245 v1(2754,3213)
BDBUS5: FTDI_B.11 U3.44 | length 1127
  Top Layer w8: v1(2723,3237) 2725.5,3234.5 2725.5,3208.27 2761.1,3172.66 U3.44
  Bottom Layer w8: FTDI_B.11 2309,3899 2478,3899 2519,3858 2519,3808.84 2718,3609.84 2718,3259.08 2719.94,3257.14 2719.94,3240.06 v1(2723,3237)
BDBUS6: FTDI_B.13 U3.45 | length 1037.8
  Top Layer w8: v1(2702,3210) 2702,3209.85 2741.06,3170.78 2741.06,3127.87 U3.45
  Bottom Layer w8: FTDI_B.13@2273,3853 2273,3831 2306,3798 2507.92,3798 2699.5,3606.42 2699.5,3212.5 v1(2702,3210)
BDBUS7: FTDI_B.15 U3.46 | length 956.7
  Top Layer w8: v1(2663,3214) 2664.38,3214 2718.47,3159.91 2718.47,3156.87 2721.38,3153.96 U3.46@2721.38,3145.38 ; U3.46@2721.38,3127.87 U3.46
  Bottom Layer w8: FTDI_B.15 2305,3703 2581,3703 2663,3621 v1(2663,3214)
CH_0: LOGIC_ANALYZER.1 LOGIC_JMP.2 SALEAE.1 | length 2006.4
  Top Layer w12: SALEAE.1 LOGIC_JMP.2
  Bottom Layer w12: LOGIC_ANALYZER.1 1656.69,2207.87 1620,2171.18 1620,1639.12 1664.94,1594.17 1870.39,1594.17 1900,1564.57 1900,1470 1950,1420 2380,1420 SALEAE.1@2430,1470
CH_1: LOGIC_ANALYZER.2 LOGIC_JMP.4 SALEAE.3 | length 1954
  Top Layer w12: SALEAE.3 LOGIC_JMP.4
  Bottom Layer w12: LOGIC_ANALYZER.2 1812.28,2186.3 1785.98,2160 1667.87,2160 1650,2142.13 1650,1650 1680,1620 1890,1620 1980,1530 2380,1530 2430,1580 SALEAE.3 SALEAE.3@2430.71,1580
CH_2: LOGIC_ANALYZER.3 LOGIC_JMP.6 SALEAE.5 | length 1505.4
  Top Layer w10: SALEAE.5 LOGIC_JMP.6
  Bottom Layer w10: 2199.29,1690.71 2259,1631 2391,1631 SALEAE.5
  Bottom Layer w12: LOGIC_ANALYZER.3 1760.16,2060 2120,2060 2170,2010 2170,1720 2199.29,1690.71
CH_3: LOGIC_ANALYZER.4 LOGIC_JMP.8 SALEAE.7 | length 1340.6
  Top Layer w12: SALEAE.7 LOGIC_JMP.8
  Bottom Layer w12: LOGIC_ANALYZER.4 2167.87,2107.87 2210,2065.75 2210,1820 2302,1728 2388,1728 SALEAE.7
CH_4: LOGIC_ANALYZER.5 LOGIC_JMP.10 SALEAE.9 | length 1212.9
  Top Layer w12: v1(2133,1885) 2225,1885 2281,1829 2389,1829 SALEAE.9 LOGIC_JMP.10
  Bottom Layer w12: LOGIC_ANALYZER.5 1769.26,1950.9 1830.11,1950.9 1896.01,1885 v1(2133,1885)
CH_5: LOGIC_ANALYZER.6 LOGIC_JMP.12 SALEAE.11 | length 1073
  Top Layer w12: v1(2128,1972) 2224,1972 2266,1930 2391,1930 2440,1979 SALEAE.11 LOGIC_JMP.12
  Bottom Layer w12: LOGIC_ANALYZER.6 1814.41,2010 1852.41,1972 v1(2128,1972)
CH_6: LOGIC_ANALYZER.7 LOGIC_JMP.14 SALEAE.13 | length 1230.3
  Top Layer w12: LOGIC_ANALYZER.7 1762.16,1858 1881,1858 2046.03,2023.03 2383.03,2023.03 SALEAE.13 LOGIC_JMP.14
CH_7: LOGIC_ANALYZER.8 LOGIC_JMP.16 SALEAE.15 | length 1141.6
  Top Layer w12: LOGIC_ANALYZER.8 1820.16,1900 1895.42,1900 2128.42,2133 2391,2133 2430,2172 SALEAE.15@2430,2190 ; SALEAE.15 LOGIC_JMP.16
EECLK: R17.2 U3.62 U4.4 | length 517.1
  Top Layer w8: R17.2@2395.69,2645 2395.69,2735.04 U4.4 2677.6,2737.6 2695,2755 2695,2785 2678.62,2801.38 2612.83,2801.38 U3.62
EECS: R16.2 U3.63 U4.5 | length 262.5
  Top Layer w8: U4.5 v1(2440,2775) 2465,2775 2472.05,2782.05 U3.63
  Bottom Layer w8: R16.2@2397,2769.31 2399.84,2772.16 2437.16,2772.16 v1(2440,2775)
EEDATA: R18.2 R19.1 U3.61 U4.1 | length 486.8
  Top Layer w8: R19.1 R18.2 ; R19.1@2215,2815 2301.16,2815 U4.1 2308.68,2812.4 2341.28,2845 2465,2845 2488.58,2821.42 U3.61
GND: C1.1 C2.1 C3.2 C4.1 C5.1 C6.1 C8.2 C9.1 C10.1 C11.1 C12.2 C13.2 C14.2 C15.2 C16.2 C17.2 C18.2 C19.2 C20.2 C21.2 C22.2 C23.2 C24.2 C25.2 C26.1 D_3V3.2 GND.1 GND_IN.1 GND_OUT.1 JTAG_1.4 JTAG_1.6 JTAG_1.8 JTAG_1.10 JTAG_1.12 JTAG_1.14 JTAG_1.16 JTAG_1.18 JTAG_1.20 JTAG_2.4 JTAG_2.6 JTAG_2.8 JTAG_2.10 JTAG_2.12 JTAG_2.14 JTAG_2.16 JTAG_2.18 JTAG_2.20 LOGIC_ANALYZER.10 POWER.2 POWER.4 POWER.6 POWER.8 POWER.10 POWER.12 POWER.14 POWER.16 R10.2 R11.2 R15.2 SALEAE.2 SALEAE.4 SALEAE.6 SALEAE.8 SALEAE.10 SALEAE.12 SALEAE.14 SALEAE.16 SWD_DISCO.3 SWD_IDC.3 SWD_IDC.5 SWD_IDC.9 TRIGGER_CONN.2 U1.2 U2.3 U3.1 U3.5 U3.10 U3.11 U3.13 U3.15 U3.25 U3.35 U3.47 U3.51 U4.2 USB_MICRO.5 | length 1181.2
  Top Layer w8: v1(2400,2995) 2400,2945 C24.2@2420.31,2945 ; v1@2702,3068 2702.05,3068.05 U3.47 ; v1@2761,2749 2761.1,2748.9 U3.5 ; v1@2859,2748 2859.53,2747.47 U3.10 U3.11 ; U3.13 2918.58,2763.9 v1(2940.2,2785.52) ; U3.15 2958.31,2692.13 2958.31,2652.69 v1(2977,2634) ; v1(2979,2920) 2979.16,2919.84 U3.25 ; C22.2@3199.69,3055 3261,3055 v1(3279,3073)
  Bottom Layer w8: C13.2@2735,2502.5 2804,2502.5 2805,2503.5 2806,2502.5 C15.2 2862.5,2502.5 2866.5,2498.5 C16.2 C16.2@2935,2498.5
  Bottom Layer w50: GND.1@3532.2,1374.96 3532.2,1592.2 3600,1660 TRIGGER_CONN.2
  other v1: 3160,2469 3255,2470 3351,2470 2425,2500 2592,2694 2865,2743.53 2761.84,2748.16 3433,2948 3584,2954 3735,2961 2131,3010 2702.84,3066.16 2520,3093 2135,3134 4035.43,3149.61 4330.71,3149.61 4625.98,3149.61 4921.26,3149.61 2519,3208 3016,3554 3016,3665 3014,3776
ISENSE_IN: ISENSE.1 ISENSE_IN.1 R1.1 R2.1 R3.1 R4.1 R5.1 R6.1 R8.2 | length 1565.2
  Top Layer w25: R8.2@4096.06,3889.53 4100,3889.53 4100,3929 ISENSE.1@4175,4004 ; ISENSE.1 ISENSE.1@4175,4004 ; ISENSE_IN.1@4225,4527.56 ISENSE_IN.1 4225,4400 4217.5,4392.5 4285,4325 R1.1@4375,4325 ; R3.1@4378.78,3954 R3.1@4389,3943.78 ; R1.1 4389.83,4281.87 R3.1@4389.83,4004 ; R6.1 4389.83,3436.43 R3.1 R3.1@4389.83,4004 ; ISENSE.1@4175,4004 R3.1@4389.83,4004
ISENSE_OUT: ISENSE.2 ISENSE_JMP.2 ISENSE_JMP.4 ISENSE_JMP.6 ISENSE_JMP.8 ISENSE_JMP.10 ISENSE_JMP.12 ISENSE_OUT.1 R9.2 | length 2067
  Top Layer w25: R9.2 4035,4035 4100,4100 4169,4100 ISENSE.2
  Bottom Layer w25: ISENSE.2@4175,4100 4598,4100 4834,4336 5047,4336 5050,4333 ; ISENSE_JMP.12 ISENSE_JMP.10 ISENSE_JMP.8 ISENSE_JMP.6 ISENSE_JMP.4 ISENSE_JMP.2 5050,4333 ; ISENSE_OUT.1 5050,4384 5047,4381 5050,4378 5050,4333
NetC7_1: C7.1 R9.1 U2.2 | length 211.6
  Top Layer w10: R9.1@4045,3815.47 4035,3815.47 4035,3780.32 C7.1@4050.32,3765 ; C7.1@4050,3755 4126.8,3678.2 U2.2
NetC7_2: C7.2 R8.1 U2.1 | length 203.6
  Top Layer w12: R8.1@4100,3815.47 4093.53,3809 4093.53,3768.84 4089.69,3765 4095.59,3759.09 4152.39,3702.3 U2.1
NetC17_1: C17.1 U3.2 X1.1 | length 296.5
  Top Layer w8: X1.1 2496.54,2582.24 2542.78,2628.49 2542.78,2642.28 C17.1 2635,2656 2648,2643 2691,2643 2701.69,2653.69 2701.69,2692.13 U3.2
NetC25_1: C25.1 U3.3 X1.3 | length 294.8
  Top Layer w8: X1.3 2563.46,2495.63 2602.84,2535 2635,2535 2650,2550 C25.1@2650,2561.5 ; C25.1@2650,2566.5 2660,2576.5 2660,2615 2672.5,2627.5 2697.42,2627.5 2721.38,2651.46 2721.38,2692.13 U3.3
NetD_3V3_1: D_3V3.1 R7.2 | length 78.7
  Top Layer w20: R7.2@3969.69,2872 4024,2872 4039.5,2887.5 D_3V3.1
NetISENSE_JMP_1: ISENSE_JMP.1 R1.2 | length 348
  Top Layer w25: R1.2@4617,4286.3 4913.7,4286.3 ISENSE_JMP.1
NetISENSE_JMP_3: ISENSE_JMP.3 R2.2 | length 334
  Top Layer w25: R2.2@4616,4150 ISENSE_JMP.3
NetISENSE_JMP_5: ISENSE_JMP.5 R3.2 | length 380.2
  Top Layer w25: R3.2@4624,3971 R3.2@4641,3954 ; R3.2@4634,3953 4743,3953 4830,4040 4940,4040 ISENSE_JMP.5
NetISENSE_JMP_7: ISENSE_JMP.7 R4.2 | length 386.3
  Top Layer w25: R4.2@4625,3820 4634,3811 4721,3811 4860,3950 ISENSE_JMP.7
NetISENSE_JMP_9: ISENSE_JMP.9 R5.2 | length 414.6
  Top Layer w25: R5.2@4604.49,3611.49 R5.2@4604.49,3621.49 ; R5.2@4640.49,3620.49 4720.49,3620.49 ISENSE_JMP.9
NetISENSE_JMP_11: ISENSE_JMP.11 R6.2 | length 506.2
  Top Layer w25: R6.2@4622,3430 4708,3430 4950,3672 ISENSE_JMP.11
NetR10_1: R10.1 U2.8 | length 127.2
  Top Layer w10: U2.8 4152.39,3507.61 4215,3445 R10.1@4215,3424.68
NetR11_1: R11.1 U2.7 | length 117.6
  Top Layer w10: U2.7 4126.8,3473.2 4155,3445 R11.1@4155,3420
NetR12_1: R12.1 R20.2 U2.5 | length 198.5
  Top Layer w10: R20.2@4000.75,3539.25 4013,3527 4074.54,3527 U2.5 4075.61,3487.25 4040,3451.63 R12.1@4040,3422.58
NetR13_1: R13.1 R21.2 U2.6 | length 248.6
  Top Layer w10: R21.2@3974.69,3485 3974.76,3485.08 4034.92,3485.08 v1(4035,3485) ; R13.1@4095,3414.37 4095,3433.8 4095.79,3433.8 4101.2,3439.21 v1(4101.2,3470.36) U2.6
  Bottom Layer w10: v1@4041,3488 4041,3479 4049.64,3470.36 v1(4101.2,3470.36) v1@4102.05,3470.36
NetR14_1: R14.1 U3.14 | length 127.9
  Top Layer w8: U3.14 2938.62,2692.13 2938.62,2570.8 R14.1@2942.93,2566.5
NetR15_1: R15.1 U3.6 | length 126.3
  Top Layer w8: v1(2780.79,2630) U3.6
  Bottom Layer w8: R15.1 2780.79,2567.28 v1(2780.79,2630)
NetR19_2: R19.2 U4.3 | length 209.9
  Top Layer w8: R19.2 2143.5,2776.5 2155,2765 2245,2765 2272.4,2737.6 U4.3
PWREN#: U3.60
RESET: JTAG_1.15 JTAG_2.15 LOGIC_JMP.13 SWD_DISCO.5 SWD_IDC.10 | length 8315.9
  Top Layer w12: JTAG_2.15 1750.63,3380 1920,3380 1940,3360 1940,2482 2191.5,2230.5 4720,2230.5 5065.15,2230.5 5370,2535.35 5370,3940 5410,3980 5560,3980 5581.18,3958.82 JTAG_1.15 ; LOGIC_JMP.13@2940,2080 3010,2150 3010,2229
  Top Layer w20: 4720,2230.5 4720,1800 SWD_DISCO.5 ; SWD_DISCO.5@4770,1730 SWD_DISCO.5 ; SWD_IDC.10 5327.87,2207.87 5280,2160 5280,1760 5250,1730 SWD_DISCO.5
RTCK: JTAG_1.11 JTAG_2.11 LOGIC_JMP.11 | length 6845.9
  Top Layer w12: JTAG_2.11 1750.63,3580 1960,3580 1980,3560 1980,2497.15 2195.65,2281.5 v1(3066.5,2281.5) 5060.99,2281.5 5330,2550.51 5330,3730 5300,3760 v1(5300,3780)
  Bottom Layer w12: LOGIC_JMP.11 3066.5,2116.5 v1(3066.5,2281.5) ; v1(5300,3780) 5570,3780 5581.18,3768.82 JTAG_1.11
SUSPEND#: U3.36
SWCLK: JTAG_1.9 JTAG_2.9 LOGIC_JMP.3 SWD_DISCO.2 SWD_IDC.4 | length 8478.4
  Top Layer w12: JTAG_2.9 1750.63,3680 1980,3680 2000,3660 2000,2504.73 2197.73,2307 v1(3212,2307) 3258.94,2307 3259.44,2306.5 4723,2306.5 5058.41,2306.5 5310,2558.09 5310,3540 5210,3640 v1(5210,3680)
  Bottom Layer w12: LOGIC_JMP.3 3213.5,1863.5 3213.5,2305.5 v1(3212,2307) ; v1(5210,3680) 5529.53,3680 JTAG_1.9
  Bottom Layer w20: v1(4723,2307) 4723,2087 4780,2030 5390,2030 5400,2020 5400,1920 5412.13,1907.87 SWD_IDC.4
SWDIO: JTAG_1.7 JTAG_2.7 LOGIC_JMP.1 SWD_DISCO.4 SWD_IDC.2 | length 8708.7
  Top Layer w12: JTAG_2.7 1758.76,3771.87 1989.84,3771.87 2020,3741.72 2020,2512.31 2199.81,2332.5 3269.5,2332.5 v1(3270,2332) 3270.5,2332.5 4676,2332.5 5056.84,2332.5 5290,2565.66 5290,3460 5210,3540 v1(5210,3580)
  Bottom Layer w12: LOGIC_JMP.1 3270,1820 v1(3270,2332) ; v1(5210,3580) 5550,3580 5581.18,3548.82 JTAG_1.7
  Bottom Layer w20: v1(4676,2333) 4676,1944 SWD_DISCO.4 5380,1830 5402.13,1807.87 SWD_IDC.2
SWO: JTAG_1.13 JTAG_2.13 LOGIC_JMP.5 SWD_DISCO.6 SWD_IDC.6 TRACE.1 TRACE.2 TRACE_MODE.1 | length 11480.9
  Top Layer w12: JTAG_2.13 1750.63,3480 1940,3480 1960,3460 1960,2489.58 2193.58,2256 v1(3188,2256) v1(4632,2256) 5063.07,2256 5350,2542.93 5350,3812.99 5300,3862.99 v1(5300,3880) ; v1@2115,3480 v1(2110,3480) 2110,4404 2228.5,4522.5 2815.5,4522.5 TRACE_MODE.1 TRACE.1@3075,4453 ; TRACE.1 TRACE.2
  Top Layer w20: SWD_DISCO.6@4770,1630 SWD_DISCO.6 5280,1630 5320,1670 5320,1970 5357.87,2007.87 SWD_IDC.6
  Bottom Layer w12: JTAG_2.13 1750.63,3480 v1(2110,3480) ; LOGIC_JMP.5 3188,1938 v1(3188,2256) ; v1(5300,3880) 5555.91,3880 5557.95,3877.95 5560,3880 5581.18,3858.82 JTAG_1.13
  Bottom Layer w20: v1(4632,2256) 4632,1732.1 4730.47,1633.63 4786.37,1633.63 SWD_DISCO.6
SWO_TRACED0: FTDI_B.2 TRACE_MODE.2 | length 469.3
  Top Layer w8: FTDI_B.2@2360,4450 2415,4505 2733,4505 TRACE_MODE.2
TDI: JTAG_1.5 JTAG_2.5 LOGIC_JMP.9 SWD_IDC.8 | length 7584.4
  Top Layer w12: JTAG_2.5 1756.88,3873.75 2016.25,3873.75 2040,3850 2040,2519.89 2201.39,2358.5 v1(3094,2358.5) 5043.5,2358.5 v1(5189,2504) 5270,2585 5270,3400 5210,3460 v1(5210,3480)
  Bottom Layer w12: LOGIC_JMP.9 3094,2044 v1(3094,2358.5) ; v1(5189,2504) 5189,2201 5282.13,2107.87 SWD_IDC.8 ; v1(5210,3480) 5550,3480 5581.18,3448.82 JTAG_1.5
TRACECLK: FTDI_B.10 TRACE.11 TRACE.12 | length 854.8
  Top Layer w8: FTDI_B.10@2362,4050 2463,3949 TRACE.11@3075,3949
  Top Layer w12: TRACE.11 TRACE.12
TRACED0: TRACE.3 TRACE.4 TRACE_MODE.3 | length 535.7
  Top Layer w8: TRACE_MODE.3@2680.5,4448.5 2780,4349 TRACE.3@3075,4349
  Top Layer w12: TRACE.3 TRACE.4
TRACED1: FTDI_B.4 TRACE.5 TRACE.6 | length 856
  Top Layer w8: FTDI_B.4 2459,4249 TRACE.5@3075,4249
  Top Layer w12: TRACE.5 TRACE.6
TRACED2: FTDI_B.6 TRACE.7 TRACE.8 | length 861.6
  Top Layer w8: FTDI_B.6@2366.5,4254.5 2366.5,4238.5 2456,4149 TRACE.7@3075,4149
  Top Layer w12: TRACE.7 TRACE.8
TRACED3: FTDI_B.8 TRACE.9 TRACE.10 | length 856
  Top Layer w8: FTDI_B.8 2459,4049 TRACE.9@3075,4049
  Top Layer w12: TRACE.9 TRACE.10
TRIGGER: LOGIC_JMP.15 TRIG.1 TRIGGER_CONN.1 | length 1723.3
  Top Layer w20: v1(3040,2180) 3720,2180 3780,2120 TRIGGER_CONN.1
  Bottom Layer w20: LOGIC_JMP.15 v1(3040,2180)
  Bottom Layer w50: TRIGGER_CONN.1 3850,1660 3924.65,1585.35 TRIG.1@3924.65,1372.44
TRST: JTAG_1.3 JTAG_2.3 LOGIC_JMP.7 | length 7029.3
  Top Layer w12: JTAG_2.3 1750.63,3980 2040,3980 2060,3960 2060,2527.46 2202.46,2385 v1(3121,2385) 5033.94,2385 5250,2601.06 5250,3330 5210,3370 v1(5210,3380)
  Bottom Layer w12: LOGIC_JMP.7 3121,1971 v1(3121,2385) ; v1(5210,3380) 5529.53,3380 JTAG_1.3
USB_N: U3.7 USB_MICRO.2 | length 1191.1
  Top Layer w8: USB_MICRO.2 1792.96,2735.73 1794.69,2734 1843,2734 1851.25,2742.25 v2(1880,2742.25) ; v1(2799,2751) 2800.12,2749.88 2800.12,2692.83 U3.7
  Bottom Layer w8: v2@1878.66,2740.91 v2(1880,2742.25) 1895.79,2742.25 1902.52,2735.52 1903,2736 2300.94,2736 2367.94,2669 2752,2669 2799,2716 v1(2799,2751)
USB_P: U3.8 USB_MICRO.3 | length 1223.8
  Top Layer w8: USB_MICRO.3 1796.29,2710.14 1802.15,2716 1842,2716 1854,2704 v2(1883,2704) ; U3.8 2820.51,2692.83 2820.51,2734.18 2831,2744.67 v1(2831,2749)
  Bottom Layer w8: v2(1883,2704) 1897,2718 2293.49,2718 2360.49,2651 2759.46,2651 2817,2708.54 2817,2728 v1@2831,2742
VCC: JTAG_1.1 JTAG_1.2 JTAG_2.1 JTAG_2.2 SWD_DISCO.1 SWD_IDC.1 | length 7787
  Top Layer w12: JTAG_2.1 1758.76,4071.87 2060,4071.87 2080,4051.87 2080,2535.04 2204.54,2410.5 v1(4788.5,2410.5) 5031.86,2410.5 5210,2588.64 v1(5210,3230)
  Top Layer w20: SWD_DISCO.1 5170,2130 5210,2090 v3(5210,1780)
  Bottom Layer w12: v1(5210,3230) 5479.53,3230 JTAG_1.2
  Bottom Layer w20: v1(4788.5,2410.5) 4788.5,2131.5 SWD_DISCO.1 ; v3(5210,1780) 5210,1750 5230,1730 5550,1730 5570,1750 SWD_IDC.1
  Bottom Layer w50: JTAG_2.1 JTAG_2.2 ; JTAG_1.2 JTAG_1.1
VPHY: C13.1 C14.1 FB1.1 U3.4 | length 219.8
  Top Layer w8: FB1.1@2741.42,2577.5 U3.4
  Bottom Layer w8: C14.1 2704,2566.5 C13.1 ; C13.1@2730,2595 2742.26,2607.26 v1(2742.26,2625.16)
VPLL: C15.1 C16.1 FB2.1 U3.9 | length 260.7
  Top Layer w8: U3.9 v1(2839.84,2630.16) 2839.84,2582.66 FB2.1
  Bottom Layer w8: v1(2839.84,2630.16) 2839.84,2590.16 2840.32,2589.68 C15.1@2862.18,2589.68 ; C15.1@2870,2577.5 2870,2561.5 C16.1@2935,2561.5
pads on no net: FTDI_B.17 JTAG_1.17 JTAG_1.19 JTAG_2.17 JTAG_2.19 LOGIC_ANALYZER.9 SWD_IDC.7 USB_MICRO.4 USB_MICRO.SH1 USB_MICRO.SH2 USB_MICRO.SH3 USB_MICRO.SH4 USB_MICRO.SH5 USB_MICRO.SH6 X1.2 X1.4

## Polygon pours and split planes (outlines as drawn)
GND on Top Layer "Top Layer-GND" (solid, pour order 12): 1574.8,4606.3 cw(c1692.91,4606.3) 1692.91,4724.41 5590.55,4724.41 cw(c5590.55,4606.3) 5708.66,4606.3 5708.66,1299.21 cw(c5590.56,1299.21) 5590.55,1181.1 1692.91,1181.1 cw(c1692.8,1299.09) 1574.8,1299.21
3V3 on Top Layer "Top Layer-3V3" (solid, pour order 8): 2633,3109 2633,2713 3026,2713 3026,3109
GND on Bottom Layer "Bottom - GND" (solid, remove dead copper, pour order 0): 1574.8,4527.56 1574.8,4624.41 cw(c1674.8,4624.41) 1674.8,4724.41 5608.66,4724.41 cw(c5608.66,4624.41) 5708.66,4624.41 5708.66,1320.47 cw(c5608.66,1320.47) 5608.66,1220.47 1674.8,1220.47 cw(c1674.8,1320.47) 1574.8,1320.47 1574.8,1377.95

## Keep-outs
Keep-Out Layer:
  the board outline again, w2

## Silkscreen, mask and mechanical layers (free items; w line width, h text height)
Top Overlay:
  rectangle: 4289,2437 5420.1,2697
  lines w10: 2120,3548 2090,3548 2090,3368 2519,3368 ; 2130,3748 2100,3748 2100,4448 2130,4448 ; 2270,1470 2240,1470 2240,2190 2270,2190 ; 2490,3949 2520,3949 ; 2520,3368 2520,3948 ; 3352,3446 3322,3446 3322,4146 3352,4146 ; 3702,3445 3732,3445 3732,4145 3702,4145 ; 4250,1480 4220,1480 4220,2180 4250,2180 ; 4500,1480 4530,1480 4530,1780 4500,1780 ; 4500,1880 4530,1880 4530,2180 4500,2180 ; 5170,3300 3890,3300 3890,4650 ; 5170,3305 5170,4650 3890,4650 ; 3890,4650 3890,4650 ; 3340,1250 3340,1820 4070,1820 4070,1250 3340,1250
  text "ETM" at 2639,4523 h40
  text "SWV" at 2827,4521 h40
  text "SWO/" at 2430,4460 h40
  text "SWO" at 3245,4430 h40
  text "0" at 2150,4418 h40
  text "TR_D0" at 2425,4405 h40
  text "IN" at 4175,4385 h40
  text "GND" at 4385,4385 h40
  text "GND" at 4700,4385 h40
  text "OUT" at 4975,4385 h40
  text "TR_D0" at 2809,4329 h40
  text "TR_D1" at 2430,4325 h40
  text "1" at 2160,4318 h40
  text "TR_D2" at 2430,4230 h40
  text "TR_D1" at 2822,4229 h40
  text "0R1" at 4785,4225 h40
  text "2" at 2150,4218 h40
  text "OUT" at 4200,4175 h40 r90
  text "1R" at 4815,4135 h40
  text "TR_D3" at 2430,4130 h40
  text "TR_D2" at 2809,4129 h40
  text "0" at 3366,4124 h40
  text "3" at 2150,4118 h40
  text "0" at 3642,4115 h40
  text "TR_D3" at 2809,4029 h40
  text "TR_CLK" at 2430,4025 h40
  text "10R" at 4775,4025 h40
  text "1" at 3376,4024 h40
  text "4" at 2150,4018 h40
  text "1" at 3652,4015 h40
  text "INPUT" at 4105,3960 h40 r90
  text "BDBUS" at 2080,3958 h40 r90
  text "TR_CLK" at 2766,3936 h40
  text "100R" at 4735,3930 h40
  text "2" at 3366,3924 h40
  text "5" at 2150,3918 h40
  text "0" at 2430,3918 h40
  text "2" at 3642,3915 h40
  text "IN" at 4195,3875 h40 r90
  text "1k" at 4820,3840 h40
  text "3" at 3366,3824 h40
  text "6" at 2150,3818 h40
  text "1" at 2440,3818 h40
  text "3" at 3642,3815 h40
  text "10k" at 4780,3740 h40
  text "4" at 3366,3724 h40
  text "7" at 2150,3718 h40
  text "2" at 2430,3718 h40
  text "4" at 3642,3715 h40
  text "ACBUS" at 3790,3675 h40 r90
  text "ADBUS" at 3296,3664 h40 r90
  text "5" at 3366,3624 h40
  text "3" at 2430,3618 h40
  text "5" at 3642,3615 h40
  text "3W MAX" at 4800,3610 h40
  text "BCBUS" at 2580,3570 h40 r90
  text "6" at 3366,3524 h40
  text "6" at 2140,3518 h40
  text "4" at 2430,3518 h40
  text "6" at 3642,3515 h40
  text "7" at 3366,3424 h40
  text "5" at 2430,3418 h40
  text "7" at 3642,3415 h40
  text "7" at 2140,3408 h40
  text "CURRENT MEASUREMENT" at 4165,3240 h40
  text "MCB 2.0" at 5007.82,2967.55 h40
  text "REV 3478" at 4959,2857 h40
  text "BOARD NUMBER" at 4499,2737 h40
  text "SWD" at 4750,2280 h40
  text "LOGIC JMP" at 2702,2252 h40
  text "DISCO" at 4710,2210 h40
  text "CH 7" at 2530,2150 h40
  text "TRIGGER" at 3010,2150 h40
  text "VCC" at 4870,2110 h40
  text "3V3 MAX 100mA" at 3641,2087 h40
  text "CH 6" at 2530,2050 h40
  text "RESET" at 3010,2050 h40
  text "POWER" at 3347,2046 h40
  text "SWCLK" at 4870,2010 h40
  text "5V  MAX 500mA" at 3641,1987 h40
  text "CH 5" at 2530,1950 h40
  text "RTCK" at 3010,1950 h40
  text "3V3" at 4620,1950 h40 r90
  text "GND" at 4870,1910 h40
  text "CH 4" at 2530,1850 h40
  text "TDI" at 3010,1850 h40
  text "TRIGGER" at 3594,1846 h40
  text "SWDIO" at 4870,1810 h40
  text "GND" at 2220,1770 h40 r90
  text "GND" at 4190,1770 h40 r90
  text "CH 3" at 2530,1750 h40
  text "TRST" at 3010,1750 h40
  text "RESET" at 4870,1710 h40
  text "CH 2" at 2530,1650 h40
  text "SWO" at 3010,1650 h40